# Altium PCB NSTTC.PcbDoc
Units mil, origin at the board's own origin, x right, y up, seen from the top; angles counter-clockwise.
Board outline 1393.7 x 1610.24 mil, 2 copper layers (Top Layer, Bottom Layer); 13 components, 17 nets, 57 pads, 9 vias.
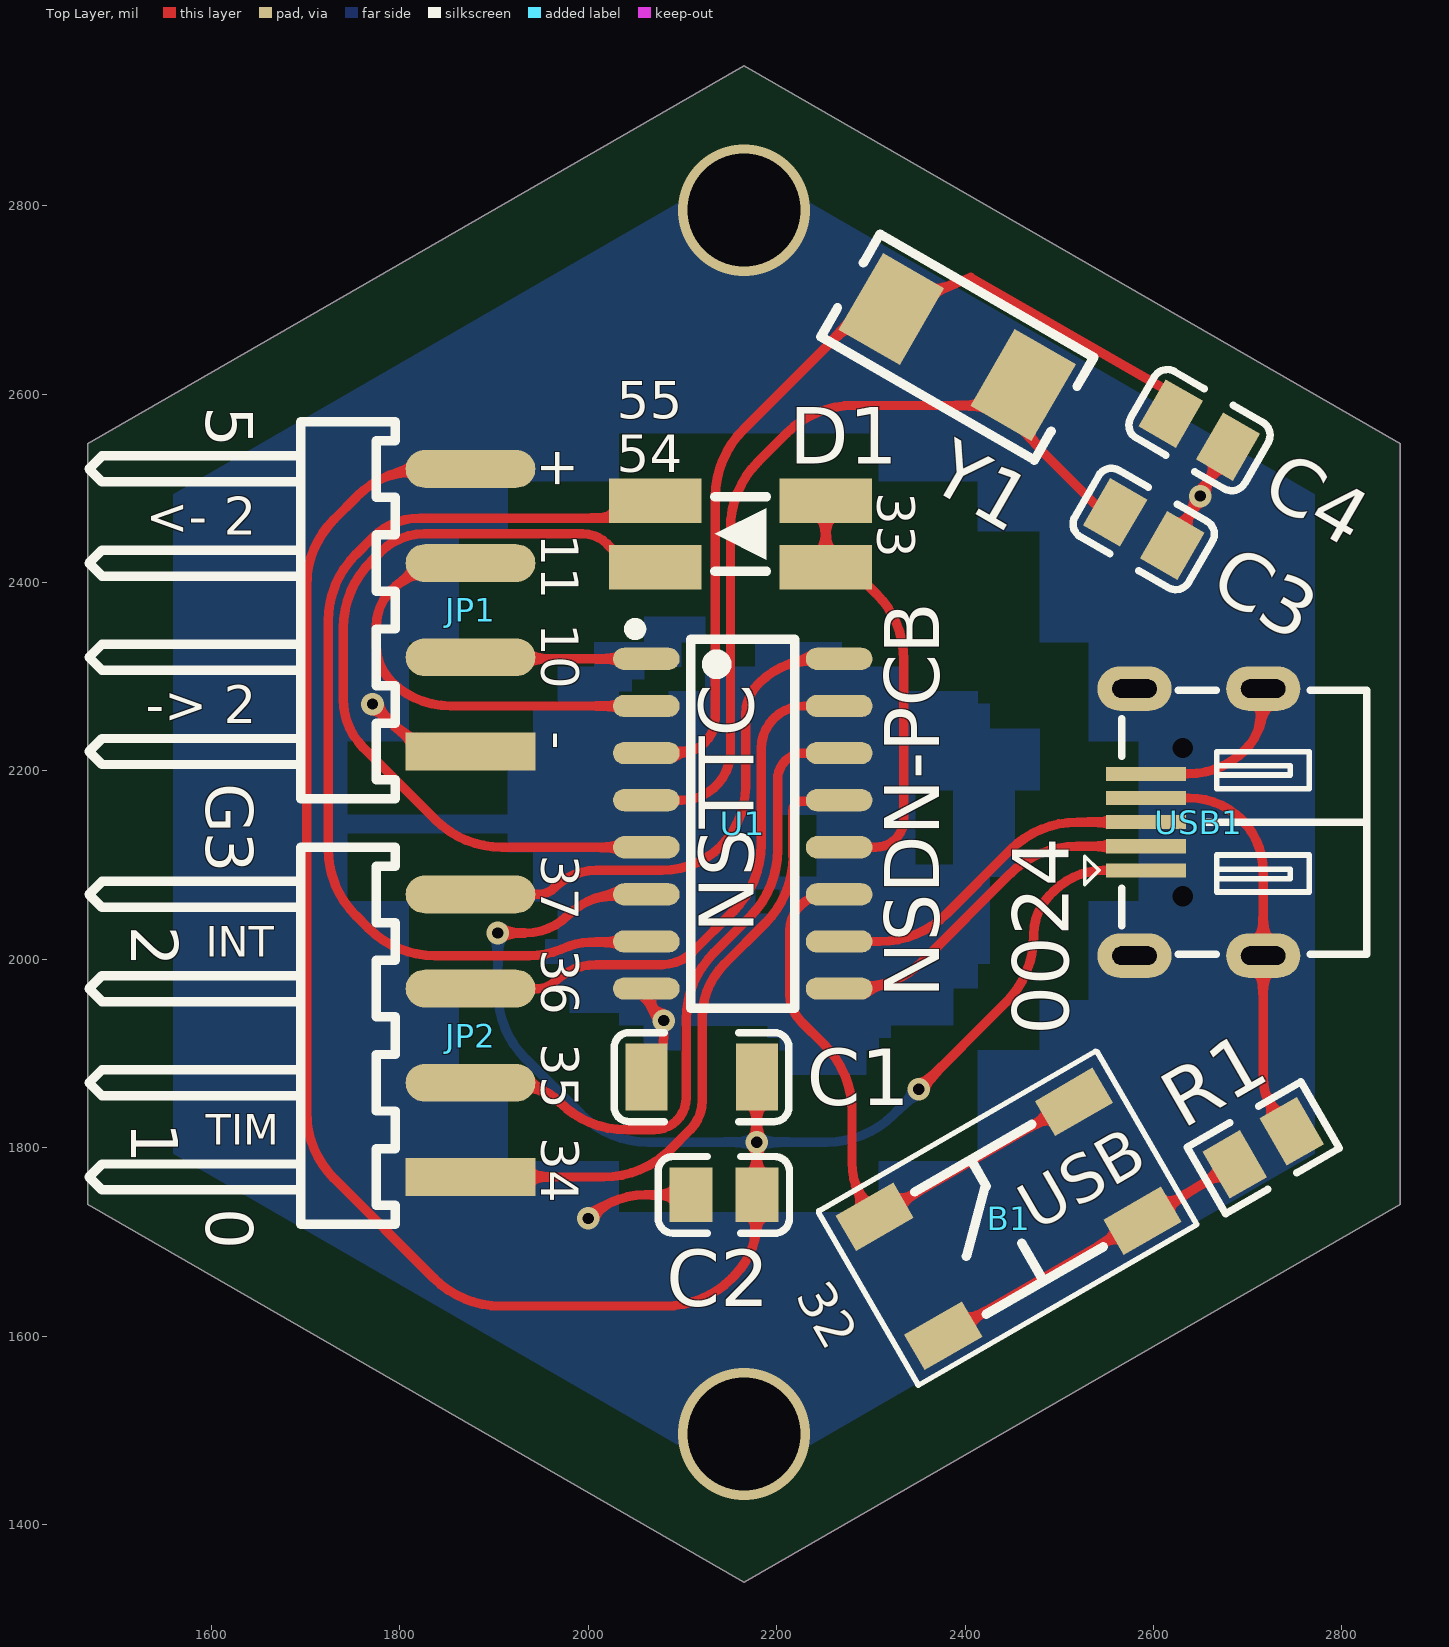
[diagram p0: Top Layer view]
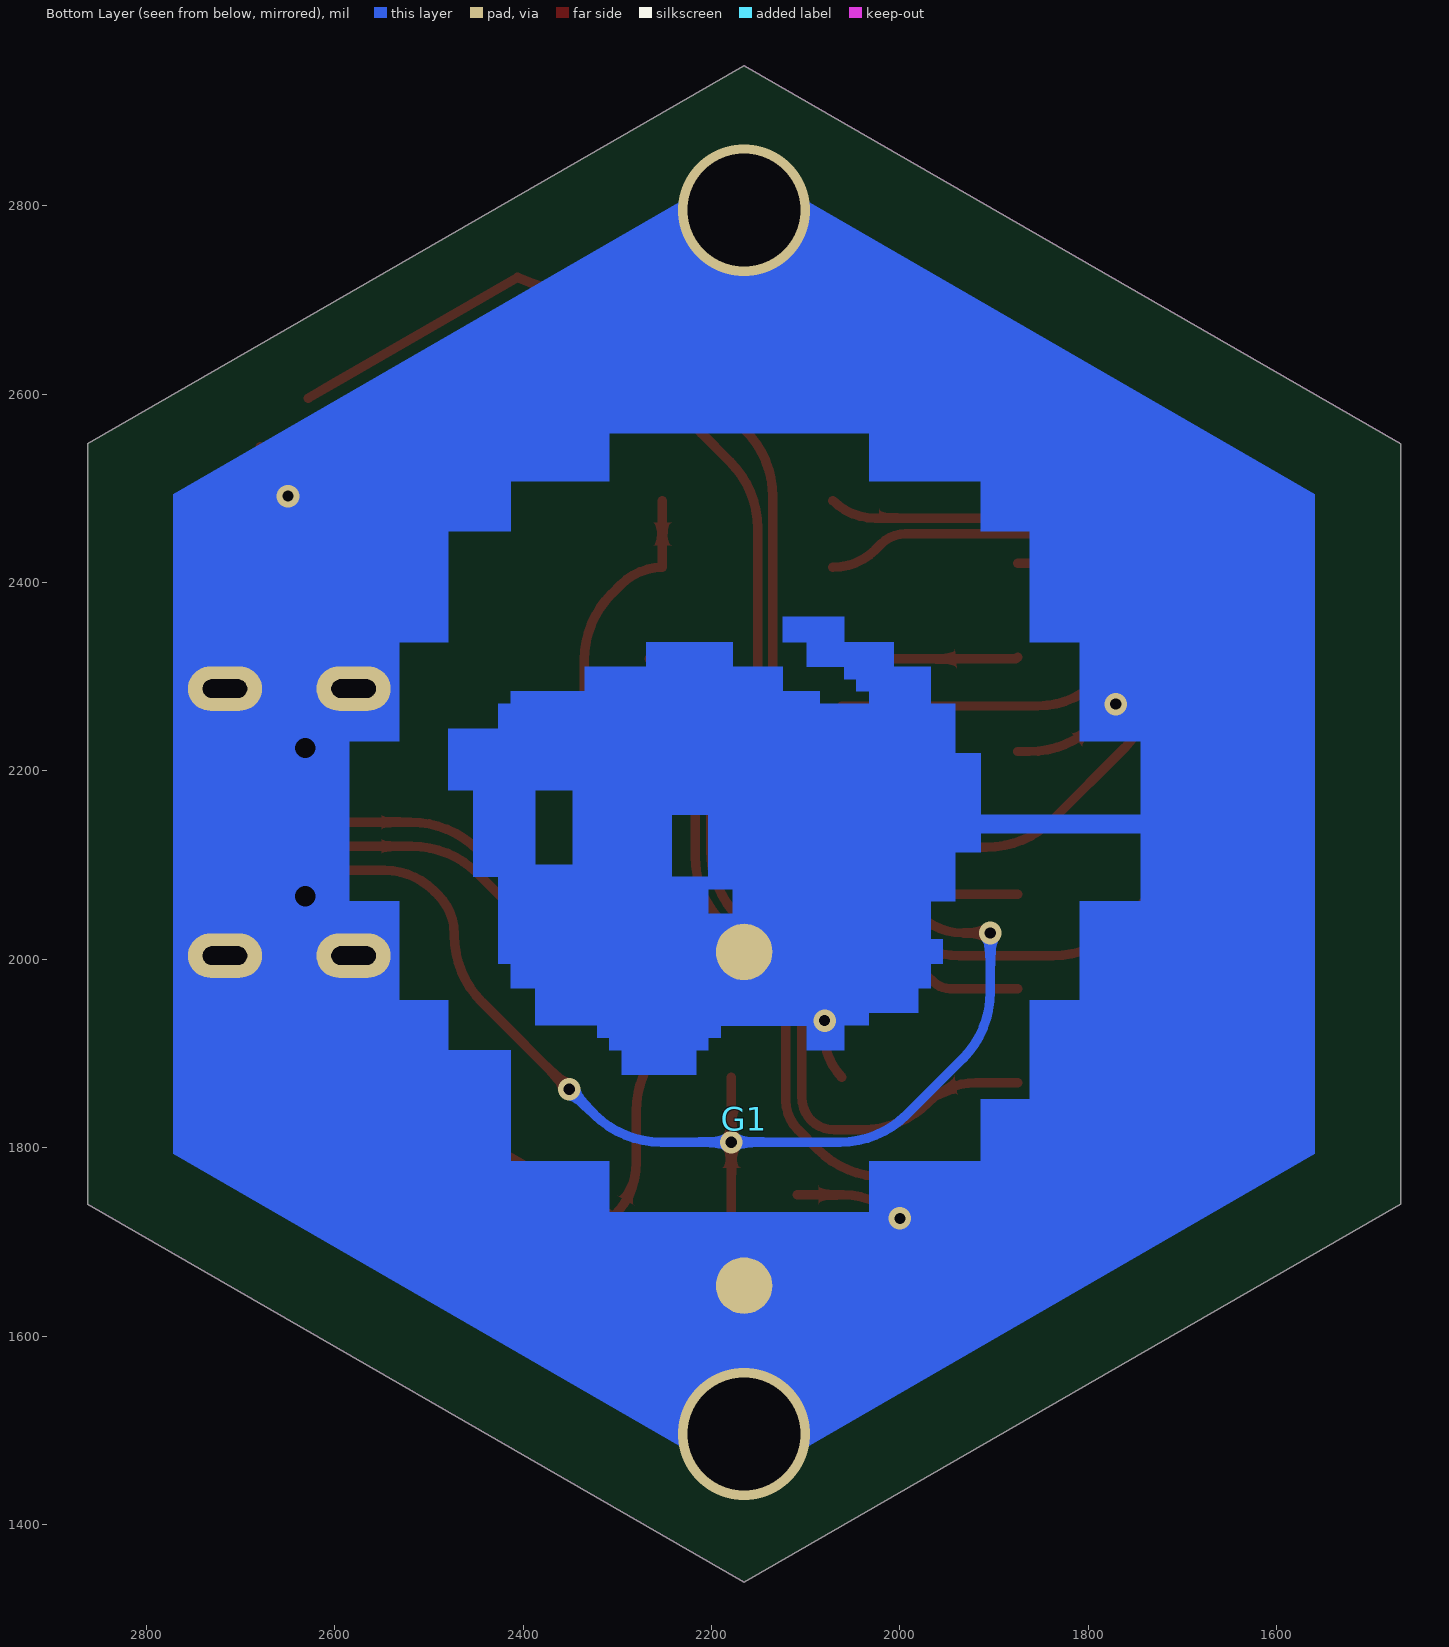
[diagram p1: Bottom Layer view, seen from below]

## Layer stack, top to bottom
Top Solder: solder mask 0.4, Solder Resist, Dk 3.5
Top Layer: signal copper 1.4
Dielectric 1: dielectric 12.6, FR-4, Dk 4.8
Bottom Layer: signal copper 1.4
Bottom Solder: solder mask 0.4, Solder Resist, Dk 3.5

## Board outline
1468.5,1740.16 2165.35,1338.58 2862.2,1740.16 2862.2,2547.24 2165.35,2948.82 1468.5,2547.24

## Design rules (kind name [scope] priority, off if disabled: settings)
Clearance [All] p1: gap=6 ignorepadtopadclearanceinfootprint=FALSE except(0: Arc-Hole Track-Hole SMDPad-Hole THPad-Hole Via-Hole Fill-Hole Poly-Hole Region-Hole Text-Hole)
HoleSize [All] p1: absolutevalues=TRUE maxlimit=250 minlimit=11.81 maxpercent=80.000 minpercent=20.000
HoleToHoleClearance [All] p1: gap=18 allowstackedmicrovias=TRUE
MinimumSolderMaskSliver [All] p1: minsoldermaskwidth=6
PolygonConnect [All] p1: connectstyle=Relief reliefconductorwidth=10 reliefentries=4 polygonreliefangle="90 Angle" airgapwidth=10
RoutingVias [All] p1: holewidth=12 width=24 viastyle="Through Hole" minholewidth=11.81 minwidth=23.62 maxholewidth=250 maxwidth=261.81
SilkToSilkClearance [All] p1: silktosilkclearance=6
SilkToSolderMaskClearance [IsPad] p1: minsilkscreentomaskgap=6 clearancetoexposedcopper=TRUE
SolderMaskExpansion [All] p1: expansion=2
UnRoutedNet [All] p1: checkbadconnections=TRUE
Width [All] p1: maxlimit=20 minlimit=6 preferedwidth=8
24 further rules are at their usual default settings.

## Components (designator, comment, footprint, x,y, rotation, side; value= is the part's Value field where it differs from the comment)
B1 "USB_CTL" MetalButton 2450,1725 r30 top
C1 "10uF (106) 10% 50V" 1206_C 2120.3,1875 r180 top
C2 "100nF(104) 10% 50V" 0805_C 2143.92,1750 r180 top
C3 "20pF (200) 5% 50V" 0805_C 2589.63,2456.89 r330 top
C4 "20pF (200) 5% 50V" 0805_C 2648.84,2561.81 r150 top
D1 "LED_BI" LED_BI 2161.64,2451.57 r0 top
G1 "NSDN_40mm_B" NSDN_40mm_B 2165.35,1338.58 r180 bottom locked
JP1 "HDR-1X4" HDR2.54-WS-4P 1875,2370.67 r90 top
JP2 "HDR-1X4" HDR2.54-WS-4P 1875,1919 r90 top
R1 "300Ω (3000) ±1%" 0805_R 2716.54,1800 r210 top
U1 "STC8F2K16S2-28I-SOP16" SOP16 2165.35,2145.67 r0 top
USB1 "USB-5P" USB-MICRO_D 2716.54,2145.67 r90 top
Y1 "12MHZ 20PF 20PPM" SMD-5032_2P 2391.73,2650 r330 top

## Footprints (in the part's own frame and the unit in brackets; to place one, negate y for a bottom-side part, rotate by r counter-clockwise, add the part's x,y. Pads: shape width x height; smd on the part's side, far side on the other; paste and mask are expansions set on the pad)
0805_C [mm]
  rect 1.16x1.47 smd: 1(-0.89,0) 2(0.89,0)
  silkscreen extent -1.77,-1.04 1.77,1.04, body extent -1,-0.62 1,0.63, height 0.77
0805_R [mm]
  rect 1.16x1.47 smd: 1(-0.89,0) 2(0.89,0)
  silkscreen extent -1.77,-1.04 1.77,1.04, body extent -1,-0.62 1,0.63, height 0.49
1206_C [mm]
  rect 1.13x1.8 smd: 1(-1.49,0) 2(1.49,0)
  silkscreen extent -2.36,-1.2 2.35,1.2, body extent -1.6,-0.81 1.6,0.79, height 1
HDR2.54-WS-4P [mm] "4P卧式贴片排针2.54"
  rect 1.02x3.5 smd: 1(-3.81,0)
  oval 1.02x3.5 smd: 2(-1.27,0) 3(1.27,0) 4(3.81,0)
  silkscreen extent -5.08,2.03 5.08,10.29, body extent -5.08,-0.76 5.08,10.34, height 2.54
LED_BI [mm]
  rect 2.5x1.2 smd: 1(-2.3,0.9) 2(2.3,0.9) 3(2.3,-0.9) 4(-2.3,-0.9)
  silkscreen extent -0.7,-1 0.7,1
MetalButton [mm]
  rect 1.8x1.1 smd: 1(-3.19,1.89) 1(3.01,1.89) 2(-3.19,-1.81) 2(3.01,-1.81)
  silkscreen extent -4.44,-2.63 4.23,2.78
NSDN_40mm_B [mil]
  round 60 smd: 1(0,314.96) 2(0,669.29)
  Top Layer region: -104,1047
  Top Layer region: -287.5,841 -287.5,749 -261,749 -261,657 -248,657 -248,631 -222,631 -222,591.5 -156,591.5 -156,578 -143,578 -143,565 -130,565 -130,539 -51,539 -51,565 -38,565 -38,578 -25,578 -25,591 66.5,591 66.5,565 106.5,565 106.5,591.5 132.5,591.5 132.5,605 185,605 185,631 198,631 198,657 211,657 211,683 198,683 198,723 -12,723 -12,710 -38,710 -38,749 -77,749 -77,815 -182,815 -182,762 -222,762 -222,841
  Top Layer region: -314,841 -314,906 -261,906 -261,933 -248,933 -248,946 -169,946 -169,972 -104,972 -104,998 -12,998 -12,972 41,972 41,946 80,946 80,933 133,933 133,946 119,946 119,959 106,959 106,972 66.5,972 66.5,998 41,998 41,1025 106,1025 106,998 159,998 159,972 198,972 198,933 224,933 224,880 251,880 251,775 224,775 224,723 -12,723 -12,736 -38,736 -38,815 -182,815 -182,841
  Top Layer region: 0,105 606,455 606,1155 0,1505 0,1220 133,1220 133,1169 251,1169 251,1116 303,1116 303,998 356,998 356,893 421,893 421,723 356,723 356,618 303,618 303,513 251,513 251,447 133,447 133,393 0,393
  Top Layer region: 0,105 -606,455 -606,1155 0,1505 0,1220 -143,1220 -143,1169 -248,1169 -248,1116 -314,1116 -314,998 -366,998 -366,893 -419,893 -419,723 -366,723 -366,618 -314,618 -314,565 -248,565 -248,447 -143,447 -143,393 0,393
  Top Layer region: -697,403
  Top Layer keep-out region: 0,0
SMD-5032_2P [mm]
  rect 1.9x2.4 smd: 1(-2.05,0) 2(2.05,0)
  silkscreen extent -3.33,-1.6 3.33,1.6
SOP16 [mm]
  oval 1.8x0.6 smd: 1(-2.634,4.403) 2(-2.634,3.133) 3(-2.634,1.863) 4(-2.634,0.593) 5(-2.634,-0.677) 6(-2.634,-1.947) 7(-2.634,-3.217) 8(-2.634,-4.487) 9(2.566,-4.487) 10(2.566,-3.217) 11(2.566,-1.947) 12(2.566,-0.677) 13(2.566,0.593) 14(2.566,1.863) 15(2.566,3.133) 16(2.566,4.403)
  silkscreen extent -3.08,-5.02 1.37,5.36
USB-MICRO_D [mm] "micro型USB ，6.7*7.5*2.5mm"
  oval 1.2x2 hole 0.5 slot 1.2 at 90 deg: 0(-3.6,0) 0(-3.6,3.47) 0(3.6,0) 0(3.6,3.47)
  round 0 hole 0.55 unplated: 0(-2,2.17) 0(2,2.17)
  rect 0.381x2.15 smd: 1(-1.3,3.16) 2(-0.65,3.16) 3(0,3.16) 4(0.65,3.16) 5(1.3,3.16)
  silkscreen extent -3.56,-2.79 3.56,4.81, body extent -3.99,-2.75 3.99,3.95, height 2.79

## Part data
B1: library part MetalButton
C1: library part "1206 10uF (106) 10% 50V", "贴片电容", Package=1206, SuppliersPartNumber=C13585, ComponentLink1Description=供应, ComponentLink1URL=http://www.szlcsc.com/product/details_14236.html, Supplier=LC
C2: library part "0805 100nF(104) 10% 50V", "贴片电容", Package=0805, SuppliersPartNumber=C49678, ComponentLink1Description=供应, ComponentLink1URL=http://www.szlcsc.com/product/details_50686.html, Supplier=LC
C3 C4: library part "0805 20pF (200) 5% 50V", "贴片电容", Package=0805, SuppliersPartNumber=C1798, ComponentLink1Description=供应, ComponentLink1URL=http://www.szlcsc.com/product/details_2150.html, Supplier=LC
JP1 JP2: library part "Header 4", "4P接插件"
R1: library part "0805 300Ω (3000) 1%", "贴片电阻", Package=0805, SuppliersPartNumber=C17617, ComponentLink1Description=供应, ComponentLink1URL=http://www.szlcsc.com/product/details_18305.html, Supplier=LC
USB1: "微型USB母座", BOM名称=Î¢Ð, 学习资源=www.oooc
Y1: library part "SMD-5032_2P 11.0592MHZ 20PF 20PPM", "贴片晶振", Package=SMD-5032_2P, SuppliersPartNumber=C52026, ComponentLink1Description=供应, ComponentLink1URL=http://www.szlcsc.com/product/details_53039.html, Supplier=LC

## Via types
v1: diameter 24, hole 12, Top Layer to Bottom Layer, tented top, 4 vias
v2: diameter 24, hole 12, Top Layer to Bottom Layer, tented both sides, 3 vias
v3: diameter 140, hole 120, Top Layer to Bottom Layer, 2 vias

## Nets (pads, with @x,y where several pads share a name; then routed paths per layer and width w, separated by ;. In a path a pad name is that pad's centre, name@x,y a point inside that pad or via, vN(x,y) a via of type N, cw(c..) or ccw(c..) an arc to the next point about the centre after c; other vN are vias at no path point)
GND: C1.2 C2.2 C3.2 C4.1 G1.1 G1.2 JP1.1 R1.1 U1.8 USB1.0 USB1.4 USB1.5 | length 1268
  Top Layer w10: v1(1771,2271) 1792.04,2249.96 ccw(c1862.75,2320.67) 1862.75,2220.67 JP1.1 ; v1(2000,1725) cw(c2060.36,1664.64) 2060.36,1750 C2.2 ; C1.2@2061.67,1875.03 ccw(c2017.31,1919.33) 2080,1919.33 v1(2080,1935) 2072.7,1942.3 cw(c2099.39,1969) U1.8 ; USB1.4 2638.22,2171.26 cw(c2638.22,2092.75) 2693.74,2148.26 cw(c2638.69,2093.22) 2716.54,2093.22 2716.54,2003.94 2716.54,1875 ccw(c2782.05,1875) 2735.72,1828.68 R1.1 ; USB1.5 2636.28,2196.85 ccw(c2636.28,2282.72) 2697,2222 ccw(c2649.84,2269.16) 2716.54,2269.16 USB1.0@2716.54,2287.4 ; C3.2 v1(2649.58,2491.83) C4.1
  Bottom Layer w20: 1744.35,2143.58 1914.35,2143.58
  other v3: 2165.35,1496.06 2165.35,2795.28
INT2: JP2.3 U1.15 | length 596.5
  Top Layer w10: JP2.3 1947.1,1969 ccw(c1947.1,1992.9) 1964,1976 cw(c2008.63,1931.37) 2008.63,1994.49 2078.38,1994.49 ccw(c2078.38,2040.62) 2111,2008 2154.27,2051.27 ccw(c2083.56,2121.98) 2183.56,2121.98 2183.56,2223.56 cw(c2229,2223.56) 2229,2269 U1.15
INT3: JP2.4 U1.16 | length 555.3
  Top Layer w10: JP2.4 1947.1,2069 ccw(c1947.1,2092.9) 1964,2076 cw(c2008.63,2031.37) 2008.63,2094.49 2078.38,2094.49 ccw(c2078.38,2183.11) 2167,2183.11 2167,2259.59 cw(c2213.87,2259.59) 2180.73,2292.73 cw(c2244.15,2229.3) 2244.15,2319 U1.16
LED_A: D1.4 U1.5 | length 872.6
  Top Layer w10: U1.5 1908.42,2119 cw(c1908.42,2219) 1837.71,2148.29 1761.21,2224.79 cw(c1812.43,2276) 1740,2276 1740,2351.58 cw(c1840,2351.58) 1769.29,2422.29 1779.48,2432.48 cw(c1826,2385.96) 1826,2451.75 1994.05,2451.75 cw(c1994.05,2415.05) 2020,2441 2026.32,2434.68 ccw(c2071.09,2479.45) D1.4
LED_B: D1.1 U1.7 | length 1058.7
  Top Layer w10: U1.7 cw(c2059.75,2020.89) 2059.75,2018.22 2001.2,2018.22 ccw(c2001.2,1962.82) 1980,2014 1971.13,2010.71 cw(c1937.08,2092.92) 1937.08,2003.94 1837.21,2003.94 cw(c1837.21,2103.94) 1766.5,2033.23 1753.29,2046.44 cw(c1824,2117.15) 1724,2117.15 1724,2359.2 cw(c1824,2359.2) 1753.29,2429.91 1771.2,2447.83 cw(c1821,2398.03) 1821,2468.45 2026.3,2468.45 ccw(c2026.3,2531.79) D1.1
LED_ENB: D1.2 D1.3 U1.12 | length 466.2
  Top Layer w10: D1.2 D1.3 cw(c2252.19,2354.16) 2296.01,2397.99 2306,2388 cw(c2235.99,2317.99) 2335,2317.99 2335,2149 cw(c2305,2149) 2305,2119 U1.12
NetB1_1: B1.1 U1.11 | length 649.7
  Top Layer w10: U1.11 2253.97,2069 ccw(c2253.97,2028.03) 2225,2057 ccw(c2251.56,2030.44) 2214,2030.44 2214,1962.97 ccw(c2254.97,1962.97) 2226,1934 2250.71,1909.29 cw(c2180,1838.58) 2280,1838.58 2280,1784.66 ccw(c2362.05,1784.66) 2304.03,1726.64 B1.1@2515.42,1848.69
NetB1_2: B1.2 R1.2 | length 358.9
  Top Layer w10: B1.2@2376.87,1600.49 2588.26,1722.54 R1.2
RxD2: JP1.2 U1.1 | length 187.1
  Top Layer w10: JP1.2 ccw(c1879.03,2324.7) 1879.03,2319 U1.1
T0: JP2.1 U1.13 | length 679.5
  Top Layer w10: JP2.1 2016.6,1769 ccw(c2016.6,1869) 2087.31,1798.29 2108.26,1819.24 ccw(c2077.5,1850) 2121,1850 2121,1937.89 cw(c2202.27,1937.89) 2144.8,1995.35 2188.02,2038.57 ccw(c2117.31,2109.28) 2217.31,2109.28 2217.31,2158.31 cw(c2227,2158.31) 2227,2168 2265.36,2168 ccw(c2265.36,2169) U1.13
T1: JP2.2 U1.14 | length 712.6
  Top Layer w10: JP2.2 1919.71,1869 cw(c1919.71,1798.29) 1969.71,1848.29 ccw(c2040.42,1919) 2040.42,1819 2069.86,1819 ccw(c2069.86,1853.14) 2094,1829 ccw(c2069.86,1853.14) 2104,1853.14 2104,1936.16 cw(c2204,1936.16) 2133.29,2006.87 2171.71,2045.29 ccw(c2101,2116) 2201,2116 2201,2191 cw(c2229,2191) 2229,2219 U1.14
TxD2: JP1.3 U1.2 | length 474.8
  Top Layer w10: JP1.3 1860.21,2420.67 ccw(c1860.21,2322.79) 1791,2392 ccw(c1829.63,2353.37) 1775,2353.37 1775,2333.63 ccw(c1829.63,2333.63) 1791,2295 ccw(c1853.77,2357.77) 1853.77,2269 U1.2
USB_DM: U1.9 USB1.2 | length 379.7
  Top Layer w10: U1.9 2284.58,1969 ccw(c2284.58,2069) 2355.29,1998.29 2447.79,2090.79 cw(c2518.5,2020.08) 2518.5,2120.08 USB1.2
USB_DP: U1.10 USB1.3 | length 369.6
  Top Layer w10: U1.10 2309.58,2019 ccw(c2309.58,2119) 2380.29,2048.29 2448.38,2116.38 cw(c2519.09,2045.67) 2519.09,2145.67 USB1.3
VCC: C1.1 C2.1 JP1.4 U1.6 USB1.1 | length 2744.9
  Top Layer w10: JP1.4 1825.09,2520.67 ccw(c1825.09,2420.67) 1754.38,2491.38 1730.29,2467.29 ccw(c1801,2396.58) 1701,2396.58 1701,1838.07 ccw(c1801,1838.07) 1730.29,1767.36 1836.36,1661.29 ccw(c1907.07,1732) 1907.07,1632 2081.58,1632 ccw(c2081.58,1732) 2152.29,1661.29 2155,1664 ccw(c2097.15,1721.85) 2178.96,1721.85 C2.1 C1.1 ; v2(1904,2028) 1933.49,2028 ccw(c1933.49,2090.95) 1978,2046.44 cw(c2032.47,1991.97) 2032.47,2069 U1.6 U1.6@2080.13,2069 ; v2(2351,1862) 2443.71,1954.71 ccw(c2373,2025.42) 2473,2025.42 2473,2027 cw(c2530.94,2027) 2489.97,2067.97 2495,2073 cw(c2546.88,2021.12) 2546.88,2094.49 USB1.1
  Bottom Layer w10: v2(1904,2028) 1904,1965.42 ccw(c2004,1965.42) 1933.29,1894.71 1992.71,1835.29 ccw(c2063.42,1906) 2063.42,1806 v2(2179,1806) 2253.58,1806 ccw(c2253.58,1906) 2324.29,1835.29 v2(2351,1862)
XI: C3.1 U1.4 Y1.2 | length 920.8
  Top Layer w10: U1.4 2099,2169 ccw(c2099,2221) 2151,2221 2151,2457.58 cw(c2251,2457.58) 2180.29,2528.29 2210.71,2558.71 cw(c2281.42,2488) 2281.42,2588 2409.37,2588 ccw(c2409.37,2661.9) Y1.2 2461.63,2585.35 ccw(c2524.35,2585.35) 2480,2541 2537.62,2483.38 ccw(c2559.28,2505.05) C3.1
XO: C4.2 U1.3 Y1.1 | length 962.6
  Top Layer w10: U1.3 2097,2219 ccw(c2097,2257) 2135,2257 2135,2491.22 cw(c2235,2491.22) 2164.29,2561.93 2272.13,2669.76 cw(c2321.84,2620.05) Y1.1 2406,2724 2602,2611 C4.2@2628.09,2595.87

## Keep-outs
Keep-Out Layer:
  the board outline again, w1

## Silkscreen, mask and mechanical layers (free items; w line width, h text height)
Top Overlay:
  text "5" at 1594.49,2587.2 h50 r270
  text "55" at 2030,2574 h40
  text "+" at 1950,2544.29 h40 r270
  text "54" at 2030,2517 h40
  text "33" at 2307,2496 h40 r270
  text "11" at 1950,2452 h40 r270
  text "<- 2" at 1530,2450.67 h40
  text "10" at 1950,2357 h40 r270
  text "-> 2" at 1530,2250.67 h40
  text "-" at 1950,2242 h40 r270
  text "G" at 1594.49,2187.2 h50 r270
  text "3" at 1594.49,2135.54 h50 r270
  text "37" at 1950,2110.96 h40 r270
  text "2" at 1515,2035.54 h50 r270
  text "NSTTC" at 2194.88,2027.56 h100 r90
  text "36" at 1950,2010.96 h40 r270
  text "INT" at 1594,2003 h32
  text "NSDN-PCB" at 2391.73,1958.66 h100 r90
  text "0024" at 2509.84,1919.29 h60 r90
  text "35" at 1950,1910.96 h40 r270
  text "1" at 1515,1827 h50 r270
  text "34" at 1950,1810.96 h40 r270
  text "TIM" at 1594,1803 h32
  text "0" at 1594.49,1735.54 h50 r270
  text "USB" at 2475,1711 h50 r30
  text "32" at 2219,1643 h40 r300
Drill Drawing:
  text "'.Legend'" at 4000,4000 h60